# EAGLE board simpluino_v1 (EAGLE 5.10)
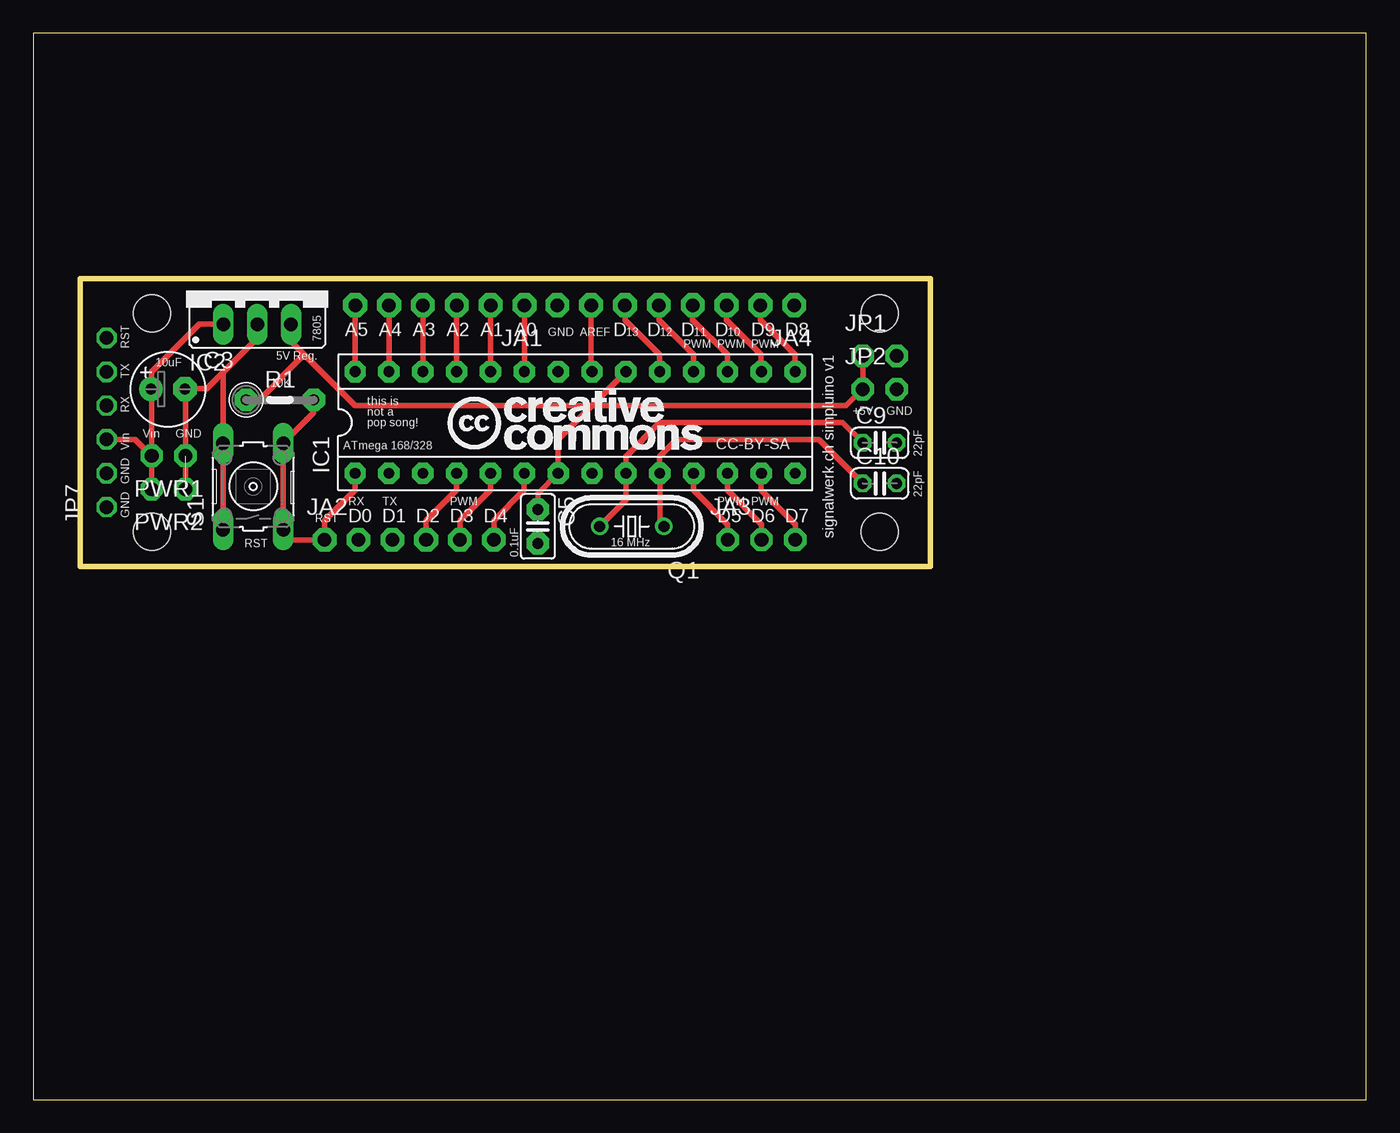
[diagram p0: board, top side]
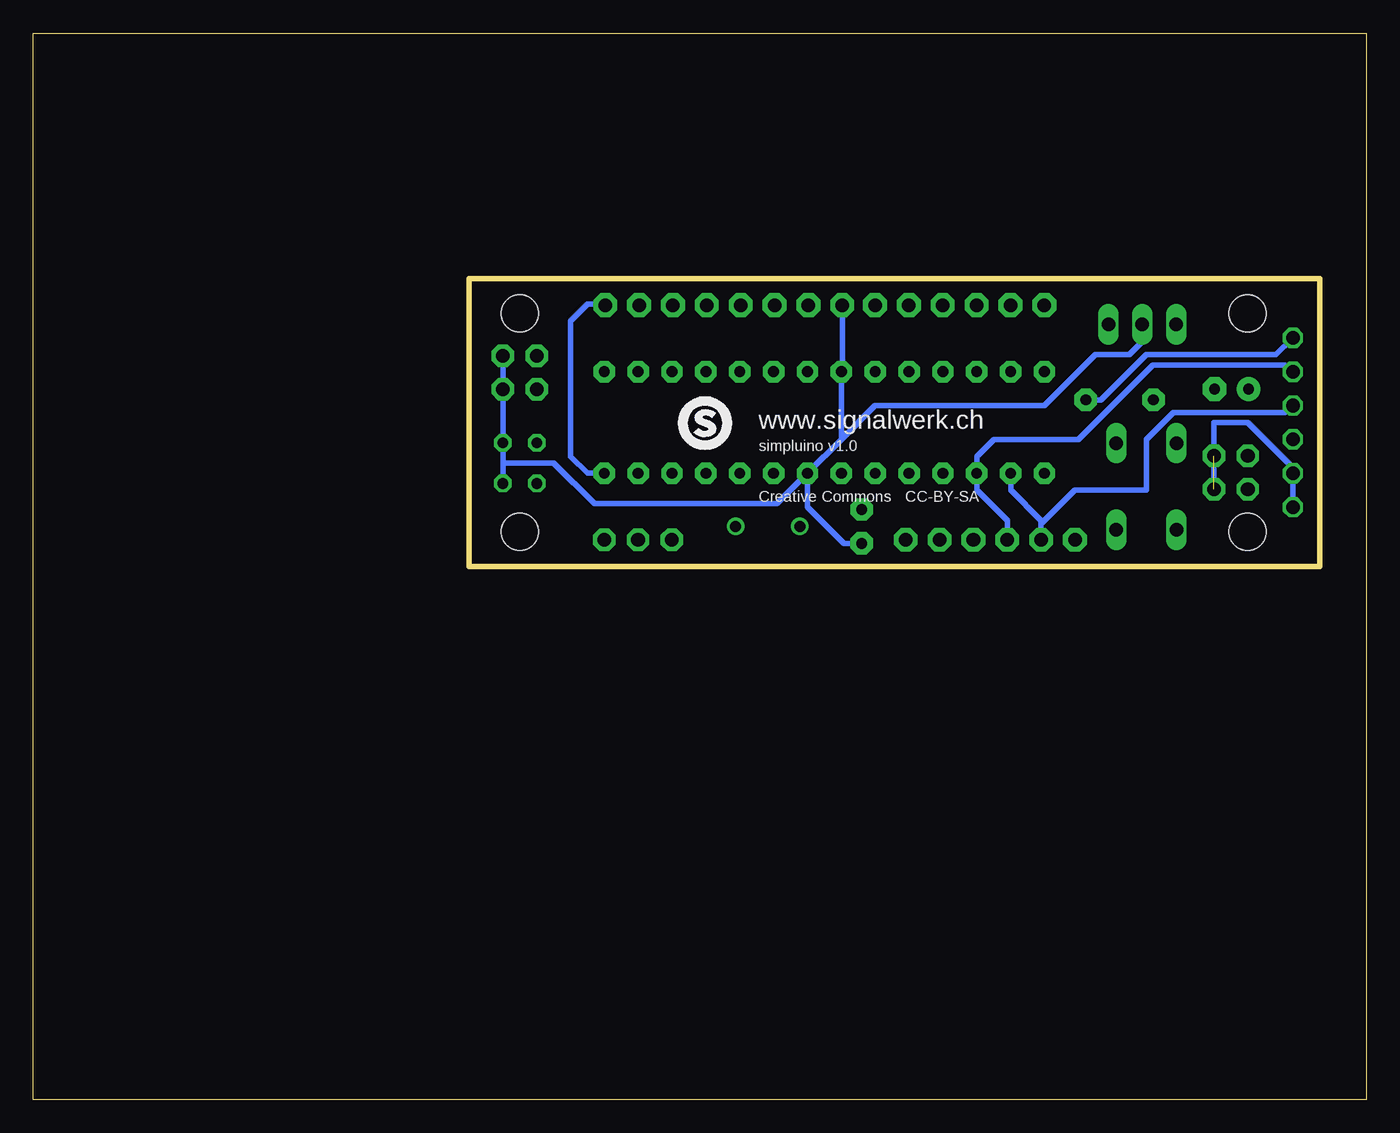
[diagram p1: board, bottom side, seen from below]

Size 100 x 80 mm. Coordinates in mm from the lower left corner, seen from the top.
Outline: 0,0 100,0 100,80 0,80 0,0
Outline: 3.5,61.6 67.3,61.6 67.3,40 3.5,40 3.5,61.6
Copper layers (1*16): Top 0.035mm / dielectric 1.5mm / Bottom 0.035mm
Design rules "default": minimum track width 10mil, minimum drill 24mil, track to track 8mil, track to pad 8mil, pad to pad 8mil, via to via 8mil, smd to smd 8mil, copper to edge 40mil, drill to drill 8mil, minimum pad ring 10mil, minimum via ring 8mil, stop-mask expansion 4mil, vias tented up to drill 0mil, thermal gap 10mil
Net classes: 1 power: width 0.61 mm
Holes 2.8 mm at 8.9,59 63.5,59 63.5,42.6 8.9,42.6

## Footprints (pad centres in the part's own frame; a part is rotated, then mirrored left to right if it is on the bottom)
E2,5-6 = drill 0.813 pad 1.778 round: + -1.27,0 | drill 0.813 pad 1.778 octagon: - 1.27,0
C025-025X050 = drill 0.813 pad 1.676 octagon: 1 -1.27,0; 2 1.27,0
C025-024X044 = drill 0.813 octagon: 1 -1.27,0; 2 1.27,0
DIL28/3 = drill 0.813 pad 1.6 octagon: 1 -16.51,-3.81; 2 -13.97,-3.81; 3 -11.43,-3.81; 4 -8.89,-3.81; 5 -6.35,-3.81; 6 -3.81,-3.81; 7 -1.27,-3.81; 8 1.27,-3.81; 9 3.81,-3.81; 10 6.35,-3.81; 11 8.89,-3.81; 12 11.43,-3.81; 13 13.97,-3.81; 14 16.51,-3.81; 15 16.51,3.81; 16 13.97,3.81; 17 11.43,3.81; 18 8.89,3.81; 19 6.35,3.81; 20 3.81,3.81; 21 1.27,3.81; 22 -1.27,3.81; 23 -3.81,3.81; 24 -6.35,3.81; 25 -8.89,3.81; 26 -11.43,3.81; 27 -13.97,3.81; 28 -16.51,3.81
78XXS = drill 1.016 long: GND 0,-2.54; IN -2.54,-2.54; OUT 2.54,-2.54
1X06-CLEANBIG = drill 1.016 pad 1.778 octagon: 1 -6.35,0; 2 -3.81,0; 3 -1.27,0; 4 1.27,0; 5 3.81,0; 6 6.35,0
1X03-CB = drill 1.016 pad 1.676 octagon: 1 -3.81,0; 2 -1.27,0; 3 1.27,0
1X08-CLEANBIG = drill 1.016 pad 1.778 octagon: 1 -8.89,0; 2 -6.35,0; 3 -3.81,0; 4 -1.27,0; 5 1.27,0; 6 3.81,0; 7 6.35,0; 8 8.89,0
1X02-CB = drill 1.016 pad 1.676 octagon: 1 -1.27,0; 2 1.27,0
1X06-CLEAN = drill 1.016 octagon: 1 -6.35,0; 2 -3.81,0; 3 -1.27,0; 4 1.27,0; 5 3.81,0; 6 6.35,0
HC49/S = drill 0.813 round: 1 -2.413,0; 2 2.413,0
0207/5V = drill 0.813 pad 1.676 octagon: 1 -2.54,0; 2 2.54,0
B3F-10XX = drill 1.016 long: 1 -3.251,2.261; 2 3.251,2.261; 3 -3.251,-2.261; 4 3.251,-2.261

## Placement (x,y rotation side)
C3  10uF/25V  [E2,5-6]  10.1,53.3 0 top
C5  0.1uF  [C025-025X050]  37.85,43 270 top
C9  22pF  [C025-024X044]  63.5,49.28 0 top
C10  22pF  [C025-024X044]  63.5,46.23 0 top
IC1  ATMEGA 168P or 328P  [DIL28/3]  40.65,50.8 0 top
IC2  [78XXS]  16.8,60.71 0 top
JA1  [1X06-CLEANBIG]  30.5,59.6 180 top
JA2  [1X06-CLEANBIG]  28.2,42 0 top
JA3  [1X03-CB]  55.9,42 0 top
JA4  [1X08-CLEANBIG]  48.2,59.6 180 top
JP1  [1X02-CB]  63.5,55.8 0 top
JP2  [1X02-CB]  63.5,53.3 0 top
JP7  [1X06-CLEAN]  5.5,50.8 90 top
PWR1  [1X02-CB]  10.15,48.3 180 top
PWR2  [1X02-CB]  10.15,45.8 180 top
Q1  16MHz  [HC49/S]  44.9,43 180 top
R1  10K  [0207/5V]  18.5,52.5 0 top
S1  RESET  [B3F-10XX]  16.5,46 90 top

## Library data of the parts
C3 C5 = minimidi
C9 C10 = resistor
IC1 = avr
IC2 = v-reg
JA1 JA2 JA4 JP1 JP2 JP7 PWR1 PWR2 = carduino
JA3 = carduino_sh
Q1 = crystal
R1 = rcl-ez
S1 = switch-omron

## Nets
+5V: C5.1 IC1.7 IC1.20 IC2.OUT JP1.1 JP2.1 R1.1
ANALOG0: IC1.23 JA1.1
ANALOG1: IC1.24 JA1.2
ANALOG2: IC1.25 JA1.3
ANALOG3: IC1.26 JA1.4
ANALOG4: IC1.27 JA1.5
ANALOG5: IC1.28 JA1.6
AREF: IC1.21 JA4.7
DIGITAL2: IC1.4 JA2.4
DIGITAL3: IC1.5 JA2.5
DIGITAL4: IC1.6 JA2.6
DIGITAL5: IC1.11 JA3.1
DIGITAL6: IC1.12 JA3.2
DIGITAL7: IC1.13 JA3.3
DIGITAL8: IC1.14 JA4.1
DIGITAL9: IC1.15 JA4.2
DIGITAL10: IC1.16 JA4.3
GND: C3.- C5.2 C9.2 C10.2 IC1.8 IC1.22 IC2.GND JA4.8 JP1.2 JP2.2 JP7.1 JP7.2 PWR1.1 PWR2.1 S1.1 S1.2
MISO: IC1.18 JA4.5
MOSI: IC1.17 JA4.4
N$6: C10.1 IC1.10 Q1.1
N$7: C9.1 IC1.9 Q1.2
RTS: IC1.1 JA2.1 JP7.6 R1.2 S1.3 S1.4
RXD: IC1.2 JA2.2 JP7.4
SCK: IC1.19 JA4.6
TXD: IC1.3 JA2.3 JP7.5
V_IN: C3.+ IC2.IN JP7.3 PWR1.2 PWR2.2

## Tracks (layer width: path | path; a pad name or v marks a point on that pad's centre or on a via)
+5V
  Top 0.406: JP1.1 JP2.1 60.96,52.07 41.92,52.07 | C5.1 37.85,45.46 IC1.7 | IC1.7 | 41.92,52.07 24.13,52.07 20.32,55.88 | 41.92,52.07 IC1.20 | IC1.7 39.38,49.53 41.92,52.07 | IC2.OUT 19.34,56.86 20.32,55.88 | R1.1 16.94,52.5 20.32,55.88
ANALOG0
  Top 0.406: JA1.1 IC1.23
ANALOG1
  Top 0.406: JA1.2 IC1.24
ANALOG2
  Top 0.406: JA1.3 IC1.25
ANALOG3
  Top 0.406: JA1.4 IC1.26
ANALOG4
  Top 0.406: JA1.5 IC1.27
ANALOG5
  Top 0.406: JA1.6 IC1.28
AREF
  Top 0.406: JA4.7 41.85,54.68 IC1.21
DIGITAL2
  Top 0.406: JA2.4 29.47,43.44 31.75,45.72 IC1.4
DIGITAL3
  Top 0.406: JA2.5 32.01,43.44 34.29,45.72 IC1.5
DIGITAL4
  Top 0.406: JA2.6 34.55,43.44 36.83,45.72 IC1.6
DIGITAL5
  Top 0.406: JA3.1 52.09,43.16 49.53,45.72 IC1.11
DIGITAL6
  Top 0.406: JA3.2 54.63,43.16 52.07,45.72 IC1.12
DIGITAL7
  Top 0.406: JA3.3 57.17,43.16 54.61,45.72 IC1.13
DIGITAL8
  Bottom 0.406: 57.15,59.54 JA4.1 57.18,59.69 58.42,59.69 59.69,58.42 59.69,48.26 58.42,46.99 IC1.14
DIGITAL9
  Top 0.406: JA4.2 54.55,58.48 57.15,55.88 IC1.15
DIGITAL10
  Top 0.406: JA4.3 52.01,58.48 54.61,55.88 IC1.16
GND  (1 unrouted)
  Top 0.406: S1.1 S1.2 14.24,54.59 | 14.24,54.59 16.8,57.15 IC2.GND | 14.24,54.59 12.95,53.3 12.91,53.34 11.43,53.34 | C3.- 11.39,53.3 11.43,53.34 | 11.43,53.34 PWR2.1
  Bottom 0.406: JP1.2 JP2.2 C9.2 64.77,47.75 | 64.77,47.75 C10.2 | C5.2 39.19,41.73 41.91,44.45 IC1.8 | JA4.8 39.31,54.68 IC1.22 39.38,49.53 | 39.38,49.53 IC1.8 | IC2.GND 16.8,56.86 17.78,55.88 20.32,55.88 24.13,52.07 36.84,52.07 39.38,49.53 | IC1.8 44.21,44.7 57.91,44.7 60.96,47.75 64.77,47.75 | JP7.1 JP7.2 5.5,47.41 8.89,50.8 11.43,50.8 PWR2.1
MISO
  Top 0.406: JA4.5 46.93,58.48 49.53,55.88 IC1.18
MOSI
  Top 0.406: JA4.4 49.47,58.48 52.07,55.88 IC1.17
N$6
  Top 0.406: C10.1 58.93,49.53 48.26,49.53 46.99,48.26 IC1.10 47,43.31 Q1.1
N$7
  Top 0.406: C9.1 60.71,50.8 46.99,50.8 44.45,48.26 IC1.9 44.46,44.97 Q1.2
RTS
  Top 0.406: R1.2 21.04,51.53 S1.4 S1.3 18.76,42 JA2.1 21.85,43.44 24.13,45.72 IC1.1
  Bottom 0.406: R1.2 19.89,52.5 16.51,55.88 6.77,55.88 JP7.6
RXD
  Bottom 0.406: 24.39,43.18 JA2.2 | 24.39,43.18 24.39,43.44 26.67,45.72 IC1.2 | 24.39,43.18 21.85,45.72 16.51,45.72 16.51,49.53 14.48,51.56 6.1,51.56 5.59,52.07 JP7.4
SCK
  Top 0.406: JA4.6 44.39,58.48 46.99,55.88 IC1.19
TXD
  Bottom 0.406: JA2.3 26.93,43.44 29.21,45.72 IC1.3 29.21,48.26 27.94,49.53 21.59,49.53 16,55.12 6.1,55.12 5.59,54.61 JP7.5
V_IN
  Top 0.406: PWR2.2 PWR1.2 | PWR1.2 8.88,53.25 C3.+ 8.89,53.36 8.89,54.61 12.45,58.17 IC2.IN | JP7.3 7.65,49.53 PWR1.2

## Text on the board
tPlace: 7805 | A5 | A4 | A3 | A2 | A1 | A0 | GND | AREF | D | 13 | D | 12 | D | 11 | D | 10 | D9 | D8 | RST | 5V Reg. | PWM | PWM | PWM | 10uF | TX | 10K | RX | this is | not a | +5V | GND | Vin | GND | pop song! | Vin | ATmega 168/328 | CC-BY-SA | 22pF | GND | RX | TX | PWM | PWM | PWM | 22pF | GND | RST | D0 | D1 | D2 | D3 | D4 | D5 | D6 | D7 | 16 MHz | signalwerk.ch simpluino v1 | RST | 0.1uF
bPlace: www.signalwerk.ch | simpluino v1.0 | Creative Commons CC-BY-SA